# Altium PCB Supply Lines.PcbDoc (part 1 of 3)
Units mil, origin at the board's own origin, x right, y up, seen from the top; angles counter-clockwise.
Board outline 2300 x 4000 mil, 4 copper layers (Top Layer 1, GND, PWR, Bottom Layer 1), stack 23.712 mil thick; 27 components, 16 nets, 73 pads, 20 vias.
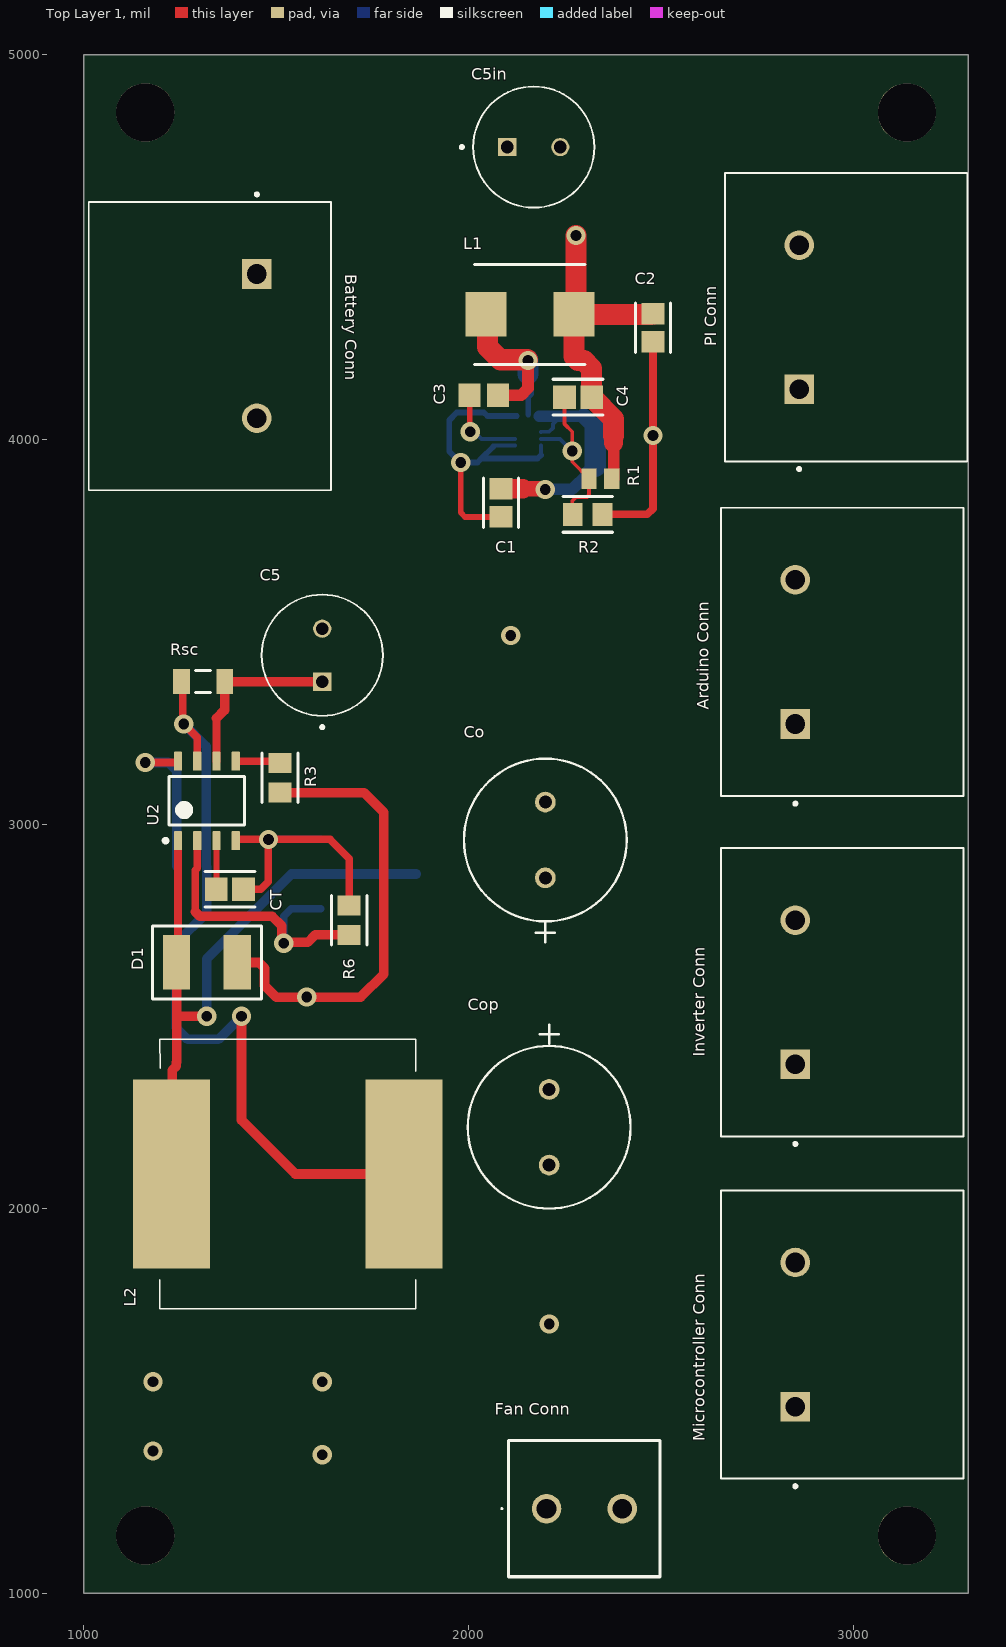
[diagram p0: Top Layer 1 view]
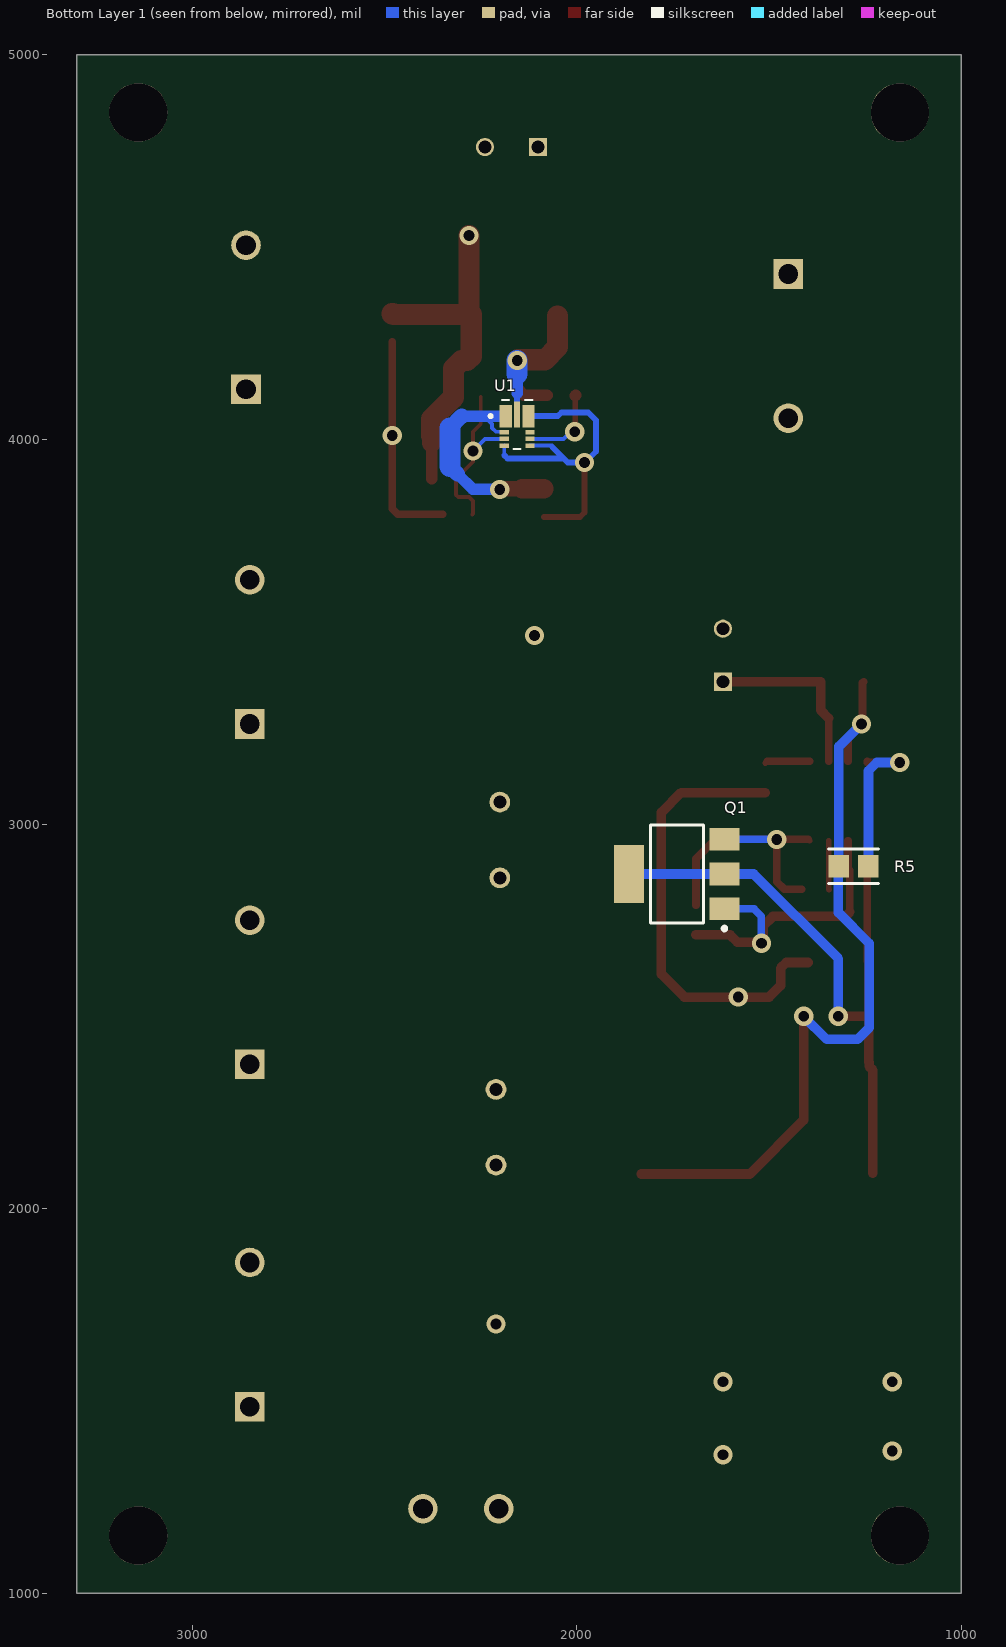
[diagram p1: Bottom Layer 1 view, seen from below]
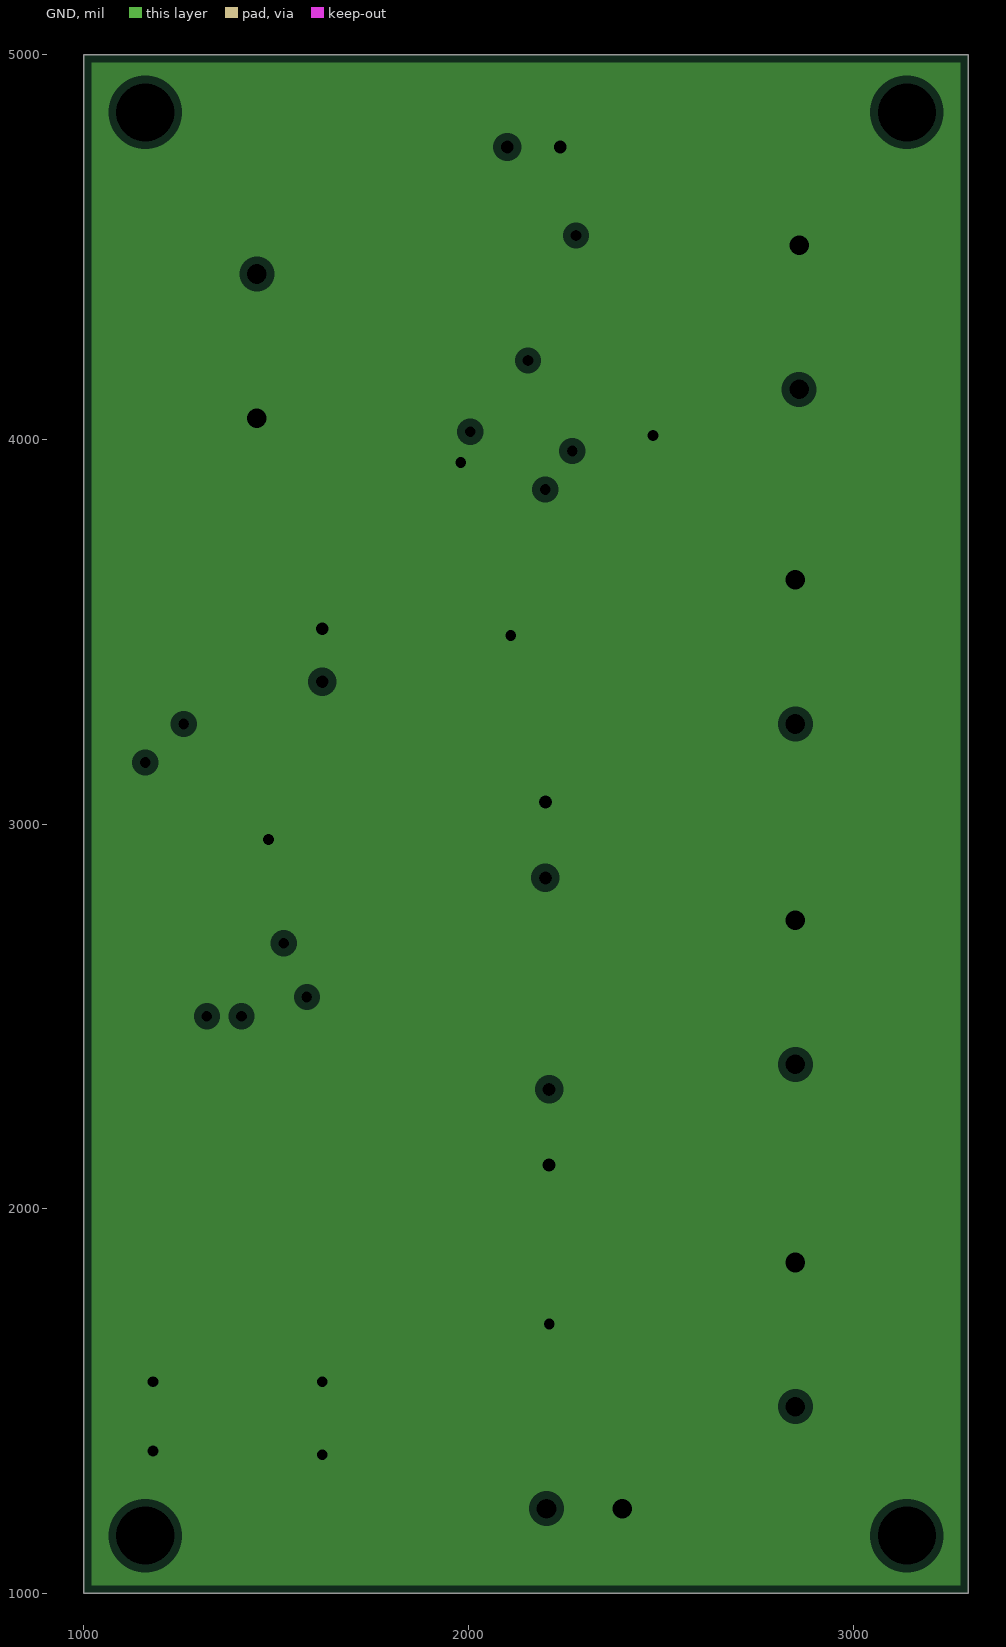
[diagram p2: GND, clearances drawn from the general rule]
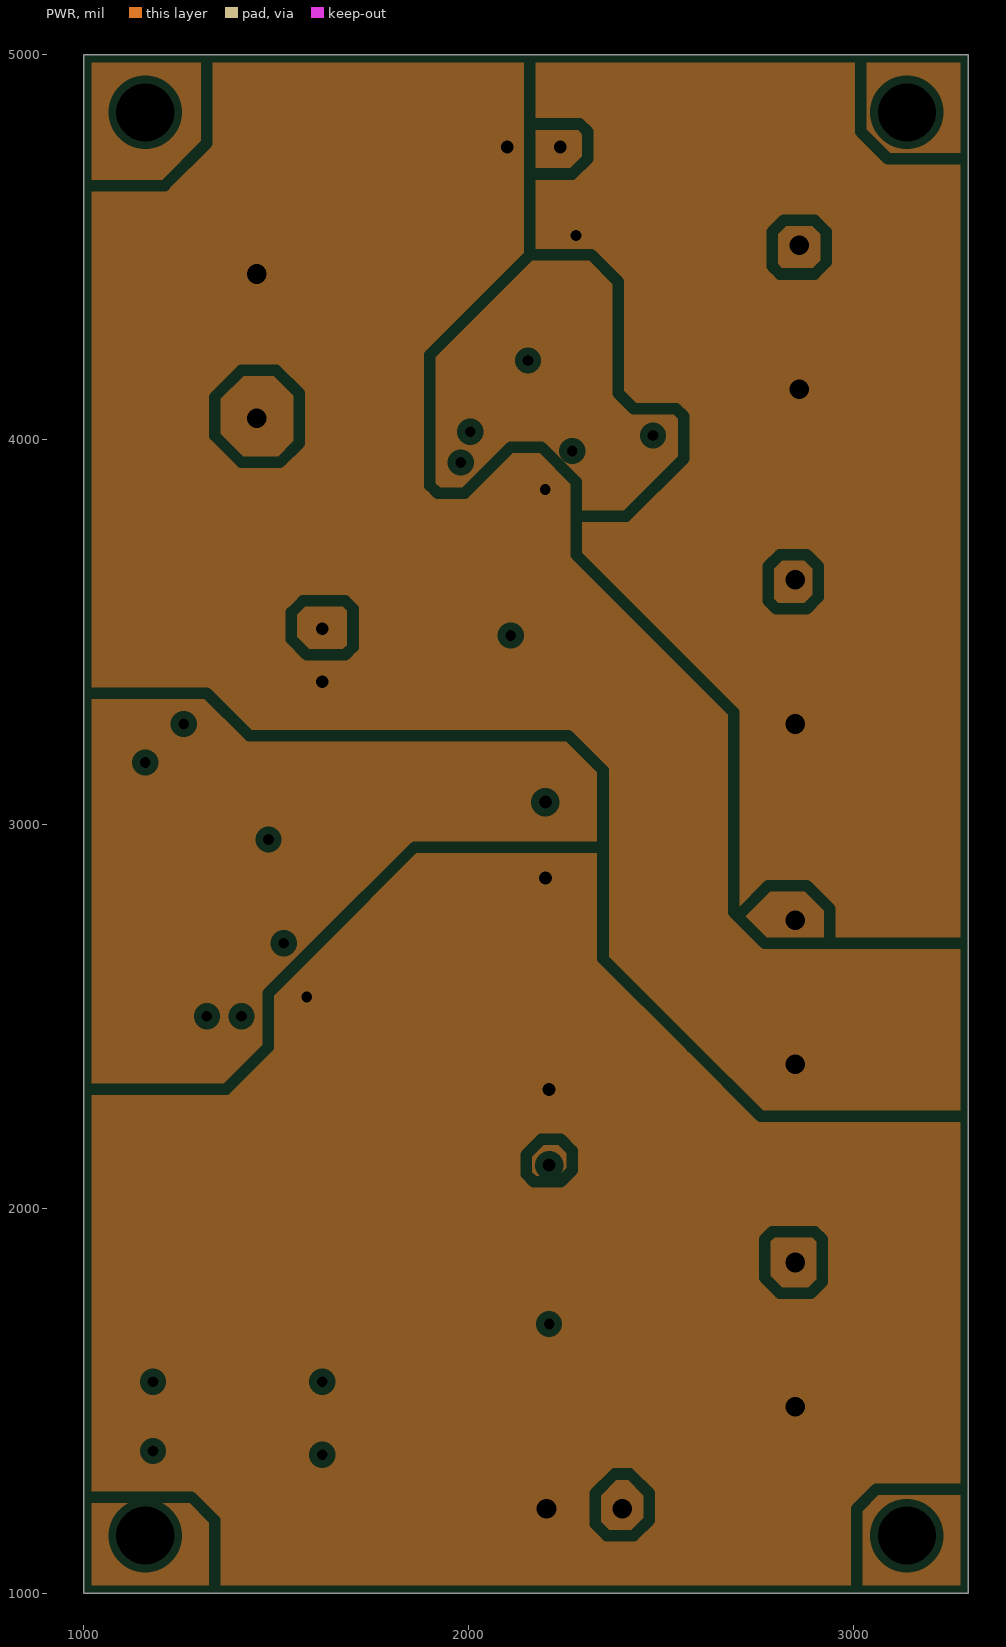
[diagram p3: PWR, clearances drawn from the general rule]
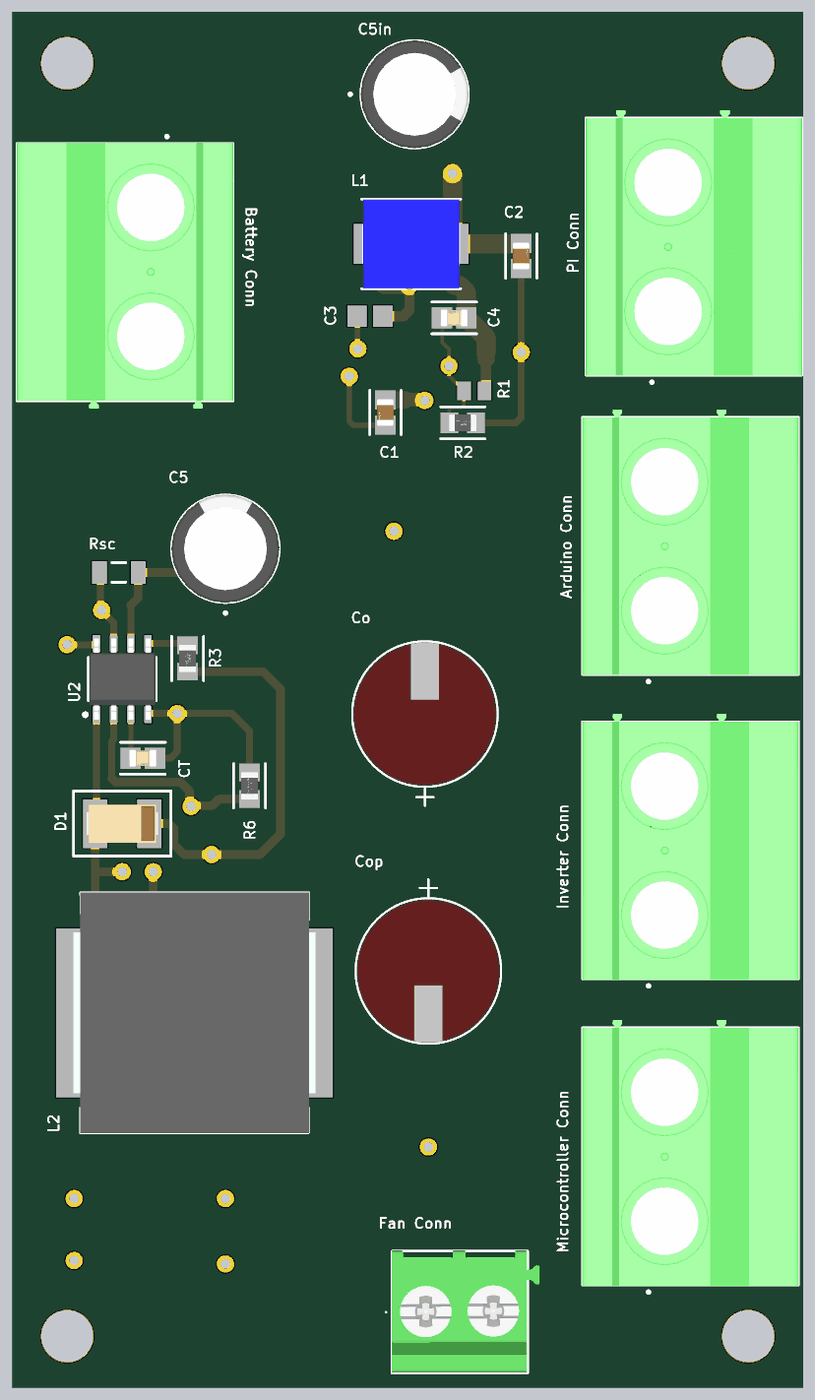
[diagram p4: 3D render of the assembled board from above, using the file's embedded part models]

## Layer stack, top to bottom
Top Solder: solder mask 0.4, Solder Resist, Dk 3.5
Top Layer 1: signal copper 1.378
Dielectric 2: prepreg 2.8, PP-006, Dk 4.1
GND: plane copper 1.378, net GND
Dielectric 1: dielectric 12.6, FR-4, Dk 4.8
PWR: plane copper 1.378
Dielectric 3: prepreg 2.8, PP-006, Dk 4.1
Bottom Layer 1: signal copper 1.378
Bottom Solder: solder mask 0.4, Solder Resist, Dk 3.5

## Board outline
1000,1000 3300,1000 3300,5000 1000,5000

## Design rules (kind name [scope] priority, off if disabled: settings)
Clearance [All] p1: gap=5 ignorepadtopadclearanceinfootprint=FALSE
HoleSize [All] p1: absolutevalues=TRUE maxlimit=250 minlimit=10 maxpercent=80.000 minpercent=20.000
PlaneClearance [All] p1: clearance=20
PlaneConnect [All] p1: planeconnectstyle=Relief reliefexpansion=20 reliefentries=4 reliefconductorwidth=10 reliefairgap=10
PolygonConnect [All] p1: connectstyle=Relief reliefconductorwidth=10 reliefentries=4 polygonreliefangle="90 Angle" airgapwidth=10
RoutingVias [All] p1: holewidth=28 width=50 viastyle="Through Hole" minholewidth=28 minwidth=50 maxholewidth=28 maxwidth=50
SilkToSilkClearance [All] p1: silktosilkclearance=5
SolderMaskExpansion [All] p1: expansion=4 istentingtop=FALSE
SupplyNets "Schematic Supply Nets" [InNet('GND')] p1: voltage=0.000
Width [All] p1: maxlimit=1000 minlimit=5 preferedwidth=10 minimp=50.000000 maximp=50.000000 favimp=50.000000
26 further rules are at their usual default settings.

## Classes and differential pairs
component class U2: C5 Co Cop CT D1 L2 Q1 R3 R4 R5 R6 Rsc U2
component class U1: C1 C2 C3 C4 C5in L1 R1 R2 U1
component class "Supply Lines": "Arduino Conn" "Battery Conn" "Fan Conn" "Inverter Conn" "Microcontroller Conn" "PI Conn"

## Components (designator, comment, footprint, x,y, rotation, side; value= is the part's Value field where it differs from the comment)
"Arduino Conn" "Arduino Conn" PHOENIX_1902547 3287.01,3072.6 r90 top (schematic designator J3)
"Battery Conn" "Battery Connector" PHOENIX_1902547 1012.99,4617.4 r270 top (schematic designator J1)
C1 "10u" FP-GRM21B-0_15-IPC_A 2085,3835 r270 top value=10µF
C2 "47u" FP-GRM21B-0_15-IPC_A 2480,4290 r90 top value=47µF
C3 "100nF" CAPC2013X140X45ML15T25 2040,4115 r180 top
C4 "47p" "(KEMET 0805) FP-C0805C-DN-IPC_A - duplicate" 2285,4110 r0 top value=47pF
C5 "100uF" CAPPRD350W60D800H1150 1620,3438.9 r90 top value=100µF
C5in "100uF" CAPPRD350W60D800H1150 2170,4760 r0 top value=100µF
Co "470u" CAP_PKPZ_10X12P5_LOW_RUB 2200,2860 r90 top value=470µF
Cop "470u" CAP_PKPZ_10X12P5_LOW_RUB 2210,2310 r270 top value=470µF
CT "3.3n" "(KEMET 0805) FP-C0805C-DN-IPC_A - duplicate" 1380,2830 r180 top value=3.3nF
D1 "CDBA3100" CDBA3100 1320,2640 r180 top
"Fan Conn" "Fan Conn" "FileName=C:\Users\cmutt\Documents\ECEN\ECEN 403_404\Supply Lines\Supply Lines.PcbLib" 2203.15,1220 r0 top (schematic designator J6)
"Inverter Conn" "Inverter Conn" PHOENIX_1902547 3287.01,2187.8 r90 top (schematic designator J5)
L1 "6.8u" INDPM7366X300N 2160,4325 r0 top value=6.8µH
L2 "82u" PA4344823ANLT 1530,2090 r270 top value=82µH
"Microcontroller Conn" "Microcontroller Conn" PHOENIX_1902547 3287.01,1297.8 r90 top (schematic designator J4)
"PI Conn" "PI Conn" PHOENIX_1902547 3297.01,3942.6 r90 top (schematic designator J2)
Q1 "NSV60601MZ4T3G" ONSC-SOT-223-4-318E-04_V 1740,2870 r0 bottom
R1 "160k" RESC2013X60X40LL20T25 2343.35,3897.87 r0 top value=160kΩ
R2 "30k" "FP-CRGCQ0805-IPC_A - duplicate" 2310,3805 r180 top value=30kΩ
R3 "1.2k" FP-CRGCQ0805-IPC_A 1510,3120 r270 top value=1.2kΩ
R5 "180" FP-RMCF0805-IPC_A 1280,2890 r180 bottom value=180Ω
R6 "10k" FP-CRGCQ0805-IPC_A 1690,2750 r270 top value=10kΩ
Rsc "0.068" "(1206) RESC3216X70X50NL05T20" 1310,3370 r180 top value=68mΩ
U1 "AP63357DV-7" CONV_AP63357DV-7 2155,4033.9 r180 bottom
U2 "MC33063ADR" D0008A_L 1320,3060 r90 top

## Footprints (in the part's own frame and the unit in brackets; to place one, negate y for a bottom-side part, rotate by r counter-clockwise, add the part's x,y. Pads: shape width x height; smd on the part's side, far side on the other; paste and mask are expansions set on the pad)
"(1206) RESC3216X70X50NL05T20" [mm] "Chip Resistor, 2-Leads, Body 3.20x1.60mm, IPC Medium Density"
  rect 1.1x1.65 smd: 1(-1.425,0) 2(1.425,0)
  silkscreen extent -0.5,-0.72 0.5,0.72, body extent -1.63,-0.82 1.62,0.82, height 0.7
"(KEMET 0805) FP-C0805C-DN-IPC_A - duplicate" [mil]
  rect 59.24x61.27 smd paste+0 mask+0: 1(-35.46,0) 2(35.46,0)
  silkscreen extent -65,-46 65,46, body extent -85,-50 85,50, height 10
CAP_PKPZ_10X12P5_LOW_RUB [mil]
  round 54 / inner round 60 / far side round 54 hole 34 paste-99999 mask+0: 1(0,0) 2(196.85,0)
  silkscreen extent -168,-212 310,212, body extent -108,-206 306,206, height 552
CAPC2013X140X45ML15T25 [mm] "Chip Capacitor, 2-Leads, Body 2.00x1.25mm, IPC Low Density"
  rect 1.45x1.55 smd: 1(-0.95,0) 2(0.95,0)
  body extent -1.08,-0.7 1.07,0.7, height 1.4
CAPPRD350W60D800H1150 [mm]
  round 1.2 hole 0.85: N(1.75,0)
  rect 1.2x1.2 hole 0.85: P(-1.75,0)
  silkscreen extent -4.85,-4 4,4, body extent -4,-4 4,4, height 11.5
CDBA3100 [mm]
  rect 1.8x3.6 smd: A(-2,0) K(2,0)
  silkscreen extent -3.6,-2.4 3.6,2.4, body extent -2.64,-1.4 2.64,1.4, height 2.34
CONV_AP63357DV-7 [mm]
  rect 0.8x1.5 smd mask+0.05: 1(-0.75,0.675) 8(0.75,0.675)
  rect 0.6x0.3 smd mask+0.05: 2(-0.85,-0.375) 3(-0.85,-0.825) 4(-0.85,-1.275) 5(0.85,-1.275) 6(0.85,-0.825) 7(0.85,-0.375)
  rect 0.4x1.73 smd mask+0.05: 9(0,0.79)
  silkscreen extent -1.85,-1.5 1,1.75, body extent -1,-1.5 1,1.5, height 0.85
D0008A_L [mm] "SOIC, 8-Leads, Body 5x4mm, Pitch 1.27mm, IPC High Density"
  rrect18% 1.25x0.55 smd: 1(-2.625,1.905) 2(-2.625,0.635) 3(-2.625,-0.635) 4(-2.625,-1.905) 5(2.625,-1.905) 6(2.625,-0.635) 7(2.625,0.635) 8(2.625,1.905)
  silkscreen extent -2.75,-2.5 1.6,2.85, body extent -3,-2.45 3,2.45, height 1.63
"FileName=C:\Users\cmutt\Documents\ECEN\ECEN 403_404\Supply Lines\Supply Lines.PcbLib" [mm]
  round 1.95 hole 1.3: 1(0,0) 2(5,0)
  silkscreen extent -3,-4.5 7.5,4.5, body extent -2.53,-4.44 8.38,4.55, height 13.5
FP-CRGCQ0805-IPC_A [mil]
  rect 51.42x59.44 smd paste+0 mask+0: 1(-38.43,0) 2(38.43,0)
  silkscreen extent -64,-46 64,46, body extent -84,-49 84,49, height 10
"FP-CRGCQ0805-IPC_A - duplicate" [mil]
  rect 51.42x59.44 smd paste+0 mask+0: 1(-38.43,0) 2(38.43,0)
  silkscreen extent -64,-46 64,46, body extent -84,-49 84,49, height 10
FP-GRM21B-0_15-IPC_A [mil]
  rect 55.34x59.38 smd paste+0 mask+0: 1(-36.47,0) 2(36.47,0)
  silkscreen extent -64,-45 64,45, body extent -39,-25 39,25, height 55
FP-RMCF0805-IPC_A [mil]
  rect 53.33x57.56 smd paste+0 mask+0: 1(-38.42,0) 2(38.42,0)
  silkscreen extent -65,-45 65,45, body extent -39,-25 39,25, height 26
INDPM7366X300N [mm]
  rect 2.7x2.95 smd: 1(-2.9,0) 2(2.9,0)
  silkscreen extent -3.65,-3.3 3.65,3.3, body extent -3.65,-3.3 3.65,3.3, height 3
ONSC-SOT-223-4-318E-04_V [mm] "SOT223, 4-Leads, Body 6.5x3.5mm, Pitch 2.3mm"
  rect 2x1.5 smd: 1(-3.15,2.3) 2(-3.15,0) 3(-3.15,-2.3)
  rect 2x3.8 smd: 4(3.15,0)
  silkscreen extent -3.27,-3.25 1.75,3.72, body extent -1.75,-3.25 1.75,3.25, height 1.75
PA4344823ANLT [mm]
  rect 12.5x5.08 smd: 1(0,7.675) 2(0,-7.675)
  silkscreen extent -8.9,-8.45 8.9,8.45, body extent -8.9,-8.94 8.9,8.94, height 8.1
PHOENIX_1902547 [mm]
  rect 1.95x1.95 / inner round 1.95 / far side rect 1.95x1.95 hole 1.3: 1(4.76,11.1)
  round 1.95 hole 1.3: 2(14.28,11.1)
  silkscreen extent -0.6,0 19.04,16, body extent -0.03,0 19.58,16, height 21.5
RESC2013X60X40LL20T25 [mm] "Chip Resistor, 2-Leads, Body 2.00x1.25mm, IPC High Density"
  rect 1x1.35 smd: 1(-0.75,0) 2(0.75,0)
  body extent -1.1,-0.72 1.1,0.72, height 0.6

## Part data
"Arduino Conn" "Battery Conn" "Inverter Conn" "Microcontroller Conn" "PI Conn": library part 1902547, "Conn PC Terminal Block 2 POS 9.52mm Solder ST Thru-Hole 32A Cardboard", Color=Green, Current=30A, Current Rating=32A, Flammability Rating="UL94 V-0", Manufacturer="Phoenix Contact", Supplier Part Number=277-5951-ND, Voltage=600V, Voltage Rating=800V, Approvals="CSA, UL", Category="Terminal Blocks", China RoHS=Compliant, ComponentLink1Description=https://datasheet.octopart.com:443/1902547-Phoenix-Contact-datasheet-86450925.pdf?src-supplier=Farnell, ComponentLink1URL=https://datasheet.octopart.com:443/1902547-Phoenix-Contact-datasheet-86450925.pdf?src-supplier=Farnell, ComponentLink2Description=https://datasheet.octopart.com:443/MKDS-5-HV--2-9%2C52-Phoenix-Contact-datasheet-58098511.pdf?src-supplier=element14+APAC, ComponentLink2URL=https://datasheet.octopart.com:443/MKDS-5-HV--2-9%2C52-Phoenix-Contact-datasheet-58098511.pdf?src-supplier=element14+APAC, ComponentLink3Description=https://datasheet.octopart.com:443/1902547-Phoenix-Contact-datasheet-154783129.pdf?src-supplier=Electro+Sonic, ComponentLink3URL=https://datasheet.octopart.com:443/1902547-Phoenix-Contact-datasheet-154783129.pdf?src-supplier=Electro+Sonic, ComponentLink4Description=https://datasheet.octopart.com:443/1902547-Phoenix-Contact-datasheet-177362804.pdf?src-supplier=Burklin+Elektronik, ComponentLink4URL=https://datasheet.octopart.com:443/1902547-Phoenix-Contact-datasheet-177362804.pdf?src-supplier=Burklin+Elektronik, ComponentLink5Description=https://datasheet.octopart.com:443/1902547-Phoenix-Contact-datasheet-13545994.pdf?src-supplier=RS+(Formerly+Allied+Electronics), ComponentLink5URL=https://datasheet.octopart.com:443/1902547-Phoenix-Contact-datasheet-13545994.pdf?src-supplier=RS+(Formerly+Allied+Electronics), ComponentLink6Description=https://datasheet.octopart.com:443/1902547-Phoenix-Contact-datasheet-62122993.pdf?src-supplier=RS+(Formerly+Allied+Electronics), ComponentLink6URL=https://datasheet.octopart.com:443/1902547-Phoenix-Contact-datasheet-62122993.pdf?src-supplier=RS+(Formerly+Allied+Electronics), ComponentLink7Description=https://datasheet.octopart.com:443/1902547-Phoenix-Contact-datasheet-33514357.pdf?src-supplier=MRO+Stop, ComponentLink7URL=https://datasheet.octopart.com:443/1902547-Phoenix-Contact-datasheet-33514357.pdf?src-supplier=MRO+Stop, ComponentLink8Description=https://datasheet.octopart.com:443/1902547-Phoenix-Contact-datasheet-11802246.pdf?src-supplier=Arrow+Electronics, ComponentLink8URL=https://datasheet.octopart.com:443/1902547-Phoenix-Contact-datasheet-11802246.pdf?src-supplier=Arrow+Electronics, Contact Material=Tin, Depth=21.5mm, Gender=Male, Height=21.5mm, Housing Color=Green, Housing Material=Polyamide, Lead Free="Lead Free", Length=19.04mm, Lifecycle Status=Production, Manufacturer Part Number=1902547, Material=Polyamide, Max Current Rating=32A, Mounting Technology=Screw, Number of Circuits=2, Number of Contacts=2, Number of Levels=1, Number of Poles=2, Number of Positions=2, Number of Positions Per Level=2, Number of Rows=1, Orientation=Straight, Pins=2, Pitch=9.52mm, Pricing="1=2.05, 10=1.543, 25=1.2168 (USD)", REACH SVHC=Yes, RoHS=Compliant, Stock=2575, Supplier=DigiKey, Termination=Screw, Weight=6.719999g, Width=16mm, Wire Gauge (Max)=30AWG, Wire Gauge (Min)=10AWG, Wire/Cable Gauge=10AWG
C1: library part GRM21BC81E106KE51L, "Ceramic Capacitor, Ceramic, 25V, 10% +Tol, 10% -Tol, X6S, 22% TC, 10uF, Surface Mount, 0805", Case Code (Imperial)=0805, Case Code (Metric)=2012, Dielectric=X6S, Dielectric Material=Ceramic, Manufacturer=Murata, Manufacturer Lifecycle Status="IN PRODUCTION", Max Operating Temperature=105°C, Min Operating Temperature=-55°C, Supplier Part Number=490-10502-1-ND, Tolerance=10%, Voltage Rating=25V, Case/Package=0805, Category="Ceramic Capacitors", ComponentLink1Description=https://datasheet.octopart.com:443/GRM21BC81E106KE51L-Murata-datasheet-155239200.pdf?src-supplier=Newark, ComponentLink1URL=https://datasheet.octopart.com:443/GRM21BC81E106KE51L-Murata-datasheet-155239200.pdf?src-supplier=Newark, ComponentLink2Description=https://datasheet.octopart.com:443/GRM21BC81E106KE51L-Murata-datasheet-178521784.pdf?src-supplier=Arrow.cn, ComponentLink2URL=https://datasheet.octopart.com:443/GRM21BC81E106KE51L-Murata-datasheet-178521784.pdf?src-supplier=Arrow.cn, ComponentLink3Description=https://datasheet.octopart.com:443/GRM21BC81E106KE51L-Murata-datasheet-165579666.pdf?src-supplier=TME, ComponentLink3URL=https://datasheet.octopart.com:443/GRM21BC81E106KE51L-Murata-datasheet-165579666.pdf?src-supplier=TME, ComponentLink4Description=https://datasheet.octopart.com:443/GRM21BC81E106KE51L-Murata-datasheet-140707432.pdf?src-supplier=Ciiva, ComponentLink4URL=https://datasheet.octopart.com:443/GRM21BC81E106KE51L-Murata-datasheet-140707432.pdf?src-supplier=Ciiva, ComponentLink5Description=https://datasheet.octopart.com:443/GRM21BC81E106KE51L-Murata-datasheet-140706587.pdf?src-supplier=Ciiva, ComponentLink5URL=https://datasheet.octopart.com:443/GRM21BC81E106KE51L-Murata-datasheet-140706587.pdf?src-supplier=Ciiva, ComponentLink6Description=https://datasheet.octopart.com:443/GRM21BC81E106KE51L-Murata-datasheet-138744753.pdf?src-supplier=Ciiva, ComponentLink6URL=https://datasheet.octopart.com:443/GRM21BC81E106KE51L-Murata-datasheet-138744753.pdf?src-supplier=Ciiva, ComponentLink7Description=https://datasheet.octopart.com:443/GRM21BC81E106KE51L-Murata-datasheet-32479577.pdf?src-supplier=Future+Electronics, ComponentLink7URL=https://datasheet.octopart.com:443/GRM21BC81E106KE51L-Murata-datasheet-32479577.pdf?src-supplier=Future+Electronics, ComponentLink8Description=https://datasheet.octopart.com/GRM21BC81E106KE51L-Murata-datasheet-12515295.pdf, ComponentLink8URL=https://datasheet.octopart.com/GRM21BC81E106KE51L-Murata-datasheet-12515295.pdf, ComponentLink9Description=https://datasheet.octopart.com/GRM21BC81E106KE51L-Murata-datasheet-12510076.pdf, ComponentLink9URL=https://datasheet.octopart.com/GRM21BC81E106KE51L-Murata-datasheet-12510076.pdf, ComponentLink10Description=https://datasheet.octopart.com/GRM21BC81E106KE51L-Murata-datasheet-11978611.pdf, ComponentLink10URL=https://datasheet.octopart.com/GRM21BC81E106KE51L-Murata-datasheet-11978611.pdf, ComponentLink11Description=https://datasheet.octopart.com/GRM21BC81E106KE51L-Murata-datasheet-10025737.pdf, ComponentLink11URL=https://datasheet.octopart.com/GRM21BC81E106KE51L-Murata-datasheet-10025737.pdf, ComponentLink12Description=https://datasheet.octopart.com/GRM21BC81E106KE51L-Murata-datasheet-8819587.pdf, ComponentLink12URL=https://datasheet.octopart.com/GRM21BC81E106KE51L-Murata-datasheet-8819587.pdf, ComponentLink13Description=https://datasheet.octopart.com/GRM21BC81E106KE51L-Murata-datasheet-38883375.pdf, ComponentLink13URL=https://datasheet.octopart.com/GRM21BC81E106KE51L-Murata-datasheet-38883375.pdf, ComponentLink14Description=http://sigma.octopart.com:80/reach_statement/Murata-company-16.pdf?src-supplier=Compliance+Statements, ComponentLink14URL=http://sigma.octopart.com:80/reach_statement/Murata-company-16.pdf?src-supplier=Compliance+Statements, Height=1.25mm, Length=2mm, Lifecycle Status=Production, Manufacturer Part Number=GRM21BC81E106KE51L, Material=Ceramic, Mounting Technology="Surface Mount", Number of Terminals=2, Pricing="1=0.23, 10=0.133, 50=0.0956, 100=0.0841, 500=0.06476, 1000=0.05881 (USD)", REACH SVHC=Yes, RoHS=Compliant, Schedule B="8532240020, 8532240020|8532240020|8532240020|8532240020|8532240020|8532240020|8532240020|8532240020|8532240020|8532240020|8532240020|8532240020|8532240020|8532240020|8532240020|8532240020|8532240020|8532240020|8532240020|8532240020|8532240020|8532240020|8532240020|85", Stock=699194, Supplier=DigiKey, Thickness=1.25mm, Voltage Rating (DC)=25V, Width=1.25mm
C2: library part GRM21BR61A476ME15L, "10V 47uF X5R ±20% 0805 Multilayer Ceramic Capacitors MLCC - SMD/SMT ROHS", Case Code (Imperial)=0805, Case Code (Metric)=2012, Dielectric=X5R, Dielectric Material=Ceramic, Manufacturer=Murata, Manufacturer Lifecycle Status="IN PRODUCTION", Max Operating Temperature=85°C, Min Operating Temperature=-55°C, Supplier Part Number=81-GRM21BR61A476ME5L, Tolerance=20%, Voltage=10V, Case/Package=0805, Category="Ceramic Capacitors", ComponentLink1Description=https://datasheet.octopart.com:443/GRM21BR61A476ME15L-Murata-datasheet-22122223.pdf?src-supplier=Upverter, ComponentLink1URL=https://datasheet.octopart.com:443/GRM21BR61A476ME15L-Murata-datasheet-22122223.pdf?src-supplier=Upverter, ComponentLink2Description=https://datasheet.octopart.com:443/GRM21BR61A476ME15L-Murata-datasheet-66077109.pdf?src-supplier=element14+APAC, ComponentLink2URL=https://datasheet.octopart.com:443/GRM21BR61A476ME15L-Murata-datasheet-66077109.pdf?src-supplier=element14+APAC, ComponentLink3Description=https://datasheet.octopart.com:443/GRM21BR61A476ME15L-Murata-datasheet-141278181.pdf?src-supplier=Geoflip, ComponentLink3URL=https://datasheet.octopart.com:443/GRM21BR61A476ME15L-Murata-datasheet-141278181.pdf?src-supplier=Geoflip, ComponentLink4Description=https://datasheet.octopart.com:443/GRM21BR61A476ME15L-Murata-datasheet-165579666.pdf?src-supplier=TME, ComponentLink4URL=https://datasheet.octopart.com:443/GRM21BR61A476ME15L-Murata-datasheet-165579666.pdf?src-supplier=TME, ComponentLink5Description=https://datasheet.octopart.com:443/GRM21BR61A476ME15L-Murata-datasheet-59876780.pdf?src-supplier=TME, ComponentLink5URL=https://datasheet.octopart.com:443/GRM21BR61A476ME15L-Murata-datasheet-59876780.pdf?src-supplier=TME, ComponentLink6Description=https://datasheet.octopart.com:443/GRM21BR61A476ME15L-Murata-datasheet-140707527.pdf?src-supplier=Ciiva, ComponentLink6URL=https://datasheet.octopart.com:443/GRM21BR61A476ME15L-Murata-datasheet-140707527.pdf?src-supplier=Ciiva, ComponentLink7Description=https://datasheet.octopart.com:443/GRM21BR61A476ME15L-Murata-datasheet-138744839.pdf?src-supplier=Ciiva, ComponentLink7URL=https://datasheet.octopart.com:443/GRM21BR61A476ME15L-Murata-datasheet-138744839.pdf?src-supplier=Ciiva, ComponentLink8Description=https://datasheet.octopart.com/GRM21BR61A476ME15L-Murata-datasheet-12515295.pdf, ComponentLink8URL=https://datasheet.octopart.com/GRM21BR61A476ME15L-Murata-datasheet-12515295.pdf, ComponentLink9Description=https://datasheet.octopart.com/GRM21BR61A476ME15L-Murata-datasheet-12510076.pdf, ComponentLink9URL=https://datasheet.octopart.com/GRM21BR61A476ME15L-Murata-datasheet-12510076.pdf, ComponentLink10Description=https://datasheet.octopart.com/GRM21BR61A476ME15L-Murata-datasheet-11978611.pdf, ComponentLink10URL=https://datasheet.octopart.com/GRM21BR61A476ME15L-Murata-datasheet-11978611.pdf, ComponentLink11Description=https://datasheet.octopart.com/GRM21BR61A476ME15L-Murata-datasheet-10025737.pdf, ComponentLink11URL=https://datasheet.octopart.com/GRM21BR61A476ME15L-Murata-datasheet-10025737.pdf, ComponentLink12Description=https://datasheet.octopart.com/GRM21BR61A476ME15L-Murata-datasheet-8819587.pdf, ComponentLink12URL=https://datasheet.octopart.com/GRM21BR61A476ME15L-Murata-datasheet-8819587.pdf, ComponentLink13Description=http://sigma.octopart.com:80/reach_statement/Murata-company-16.pdf?src-supplier=Compliance+Statements, ComponentLink13URL=http://sigma.octopart.com:80/reach_statement/Murata-company-16.pdf?src-supplier=Compliance+Statements, Country of Origin=Philippines, Depth=1.25mm, Dissipation Factor=0.035%, Export Control Classification Number (ECCN) Code=EAR99, Harmonized Tariff Schedule (HTS) Code=8532.24.00.20, Height=1.25mm, Introduction Date=2013-11-20, Lead Free="Lead Free", Length=2mm, Lifecycle Status=Production, Manufacturer Part Number=GRM21BR61A476ME15L, Material=Ceramic, Mounting Technology="Surface Mount", Number of Terminals=2, Packaging="Cut Tape", Pricing="1=0.64, 10=0.423, 50=0.285, 100=0.264, 500=0.213, 1000=0.195, 3000=0.152, 6000=0.147, 10000=0.17 (USD)", REACH SVHC=Yes, RoHS=Compliant, Schedule B="8532240020, 8532240020|8532240020, 8532240020|8532240020|8532240020, 8532240020|8532240020|8532240020|8532240020", Stock=454455, Supplier=Mouser, Termination=SMD/SMT, Thickness=1.25mm, Voltage Rating=10V, Voltage Rating (DC)=10V, Width=1.25mm
C3: library part GCM21BR71E104KA37L, "Ceramic Capacitor, Ceramic, 25V, 10% +Tol, 10% -Tol, X7R, 15% TC, 0.1uF, Surface Mount, 0805", Case Code (Imperial)=0805, Case Code (Metric)=2012, Dielectric=X7R, Dielectric Material=Ceramic, Manufacturer=Murata, Manufacturer Lifecycle Status=NRND, Max Operating Temperature=125°C, Min Operating Temperature=-55°C, Ratings=AEC-Q200, Supplier Part Number=490-14779-1-ND, Tolerance=10%, Voltage Rating=25V, Case/Package=0805, Category="Ceramic Capacitors", ComponentLink1Description=https://datasheet.octopart.com:443/GCM21BR71E104KA37L-Murata-datasheet-141268656.pdf?src-supplier=Geoflip, ComponentLink1URL=https://datasheet.octopart.com:443/GCM21BR71E104KA37L-Murata-datasheet-141268656.pdf?src-supplier=Geoflip, ComponentLink2Description=https://datasheet.octopart.com:443/GCM21BR71E104KA37L-Murata-datasheet-140660253.pdf?src-supplier=Ciiva, ComponentLink2URL=https://datasheet.octopart.com:443/GCM21BR71E104KA37L-Murata-datasheet-140660253.pdf?src-supplier=Ciiva, ComponentLink3Description=https://datasheet.octopart.com:443/GCM21BR71E104KA37L-Murata-datasheet-138719617.pdf?src-supplier=Ciiva, ComponentLink3URL=https://datasheet.octopart.com:443/GCM21BR71E104KA37L-Murata-datasheet-138719617.pdf?src-supplier=Ciiva, ComponentLink4Description=https://datasheet.octopart.com:443/GCM21BR71E104KA37L-Murata-datasheet-128592896.pdf?src-supplier=X-ON, ComponentLink4URL=https://datasheet.octopart.com:443/GCM21BR71E104KA37L-Murata-datasheet-128592896.pdf?src-supplier=X-ON, ComponentLink5Description=https://datasheet.octopart.com/GCM21BR71E104KA37L-Murata-datasheet-14404970.pdf, ComponentLink5URL=https://datasheet.octopart.com/GCM21BR71E104KA37L-Murata-datasheet-14404970.pdf, ComponentLink6Description=http://sigma.octopart.com:80/reach_statement/Murata-company-16.pdf?src-supplier=Compliance+Statements, ComponentLink6URL=http://sigma.octopart.com:80/reach_statement/Murata-company-16.pdf?src-supplier=Compliance+Statements, Depth=1.25mm, Height=1.25mm, Length=2mm, Lifecycle Status=NRND, Manufacturer Part Number=GCM21BR71E104KA37L, Mounting Technology="Surface Mount", Number of Terminals=2, Pricing="1=0.35, 10=0.208, 50=0.1528, 100=0.1358, 500=0.10726, 1000=0.09846 (USD)", Radiation Hardening=No, REACH SVHC=Yes, RoHS=Compliant, Schedule B="8532240020, 8532240020|8532240020|8532240020|8532240020|8532240020", Stock=12316, Supplier=DigiKey, Termination=SMD/SMT, Voltage Rating (DC)=25V, Width=1.25mm
C4: library part C0805C470J5GACTU, "50V 47pF C0G ±5% 0805 Multilayer Ceramic Capacitors MLCC - SMD/SMT ROHS", Case Code (Imperial)=0805, Dielectric Material=Ceramic, Manufacturer=KEMET, Max Operating Temperature=125°C, Min Operating Temperature=-55°C, Supplier Part Number=399-C0805C470J5GACTUCT-ND, Temperature Coefficient=30ppm/°C, Tolerance=5%, Voltage=50V, Case/Package=0805, Category="Ceramic Capacitors", China RoHS=Compliant, ComponentLink1Description=https://datasheet.octopart.com:443/C0805C470J5GACTU-KEMET-datasheet-178132257.pdf?src-supplier=IHS, ComponentLink1URL=https://datasheet.octopart.com:443/C0805C470J5GACTU-KEMET-datasheet-178132257.pdf?src-supplier=IHS, ComponentLink2Description=https://datasheet.octopart.com:443/C0805C470J5GAC7800-KEMET-datasheet-182042351.pdf?src-supplier=IHS, ComponentLink2URL=https://datasheet.octopart.com:443/C0805C470J5GAC7800-KEMET-datasheet-182042351.pdf?src-supplier=IHS, ComponentLink3Description=https://datasheet.octopart.com:443/C0805C470J5GACTU-KEMET-datasheet-68331921.pdf?src-supplier=Upverter, ComponentLink3URL=https://datasheet.octopart.com:443/C0805C470J5GACTU-KEMET-datasheet-68331921.pdf?src-supplier=Upverter, ComponentLink4Description=https://datasheet.octopart.com:443/C0805C470J5GACTU-Kemet-datasheet-5314449.pdf?src-supplier=Newark, ComponentLink4URL=https://datasheet.octopart.com:443/C0805C470J5GACTU-Kemet-datasheet-5314449.pdf?src-supplier=Newark, ComponentLink5Description=https://datasheet.octopart.com:443/C0805C470J5GACTU-Kemet-datasheet-10282724.pdf?src-supplier=Newark, ComponentLink5URL=https://datasheet.octopart.com:443/C0805C470J5GACTU-Kemet-datasheet-10282724.pdf?src-supplier=Newark, ComponentLink6Description=https://datasheet.octopart.com:443/C0805C470J5GACTU-KEMET-datasheet-170667471.pdf?src-supplier=Newark, ComponentLink6URL=https://datasheet.octopart.com:443/C0805C470J5GACTU-KEMET-datasheet-170667471.pdf?src-supplier=Newark, ComponentLink7Description=https://datasheet.octopart.com:443/C0805C470J5GACTU-KEMET-datasheet-149524325.pdf?src-supplier=Farnell, ComponentLink7URL=https://datasheet.octopart.com:443/C0805C470J5GACTU-KEMET-datasheet-149524325.pdf?src-supplier=Farnell, ComponentLink8Description=https://datasheet.octopart.com:443/C0805C470J5GACTU-KEMET-datasheet-101576292.pdf?src-supplier=Farnell, ComponentLink8URL=https://datasheet.octopart.com:443/C0805C470J5GACTU-KEMET-datasheet-101576292.pdf?src-supplier=Farnell, ComponentLink9Description=https://datasheet.octopart.com:443/C0805C470J5GACTU-Kemet-datasheet-10540709.pdf?src-supplier=Farnell, ComponentLink9URL=https://datasheet.octopart.com:443/C0805C470J5GACTU-Kemet-datasheet-10540709.pdf?src-supplier=Farnell, ComponentLink10Description=https://datasheet.octopart.com:443/C0805C470J5GACTU-KEMET-datasheet-178088151.pdf?src-supplier=element14+APAC, ComponentLink10URL=https://datasheet.octopart.com:443/C0805C470J5GACTU-KEMET-datasheet-178088151.pdf?src-supplier=element14+APAC, ComponentLink11Description=https://datasheet.octopart.com:443/C0805C470J5GACTU-KEMET-datasheet-178088150.pdf?src-supplier=element14+APAC, ComponentLink11URL=https://datasheet.octopart.com:443/C0805C470J5GACTU-KEMET-datasheet-178088150.pdf?src-supplier=element14+APAC, ComponentLink12Description=https://datasheet.octopart.com:443/C0805C470J5GACTU-Kemet-datasheet-22084244.pdf?src-supplier=element14+APAC, ComponentLink12URL=https://datasheet.octopart.com:443/C0805C470J5GACTU-Kemet-datasheet-22084244.pdf?src-supplier=element14+APAC, ComponentLink13Description=https://datasheet.octopart.com:443/C0805C470J5GACTU-Kemet-datasheet-48876295.pdf?src-supplier=element14+APAC, ComponentLink13URL=https://datasheet.octopart.com:443/C0805C470J5GACTU-Kemet-datasheet-48876295.pdf?src-supplier=element14+APAC, ComponentLink14Description=https://datasheet.octopart.com:443/C0805C470J5GACTU-KEMET-datasheet-37178240.pdf?src-supplier=Electro+Sonic, ComponentLink14URL=https://datasheet.octopart.com:443/C0805C470J5GACTU-KEMET-datasheet-37178240.pdf?src-supplier=Electro+Sonic, ComponentLink15Description=https://datasheet.octopart.com:443/C0805C470J5GACTU-Kemet-datasheet-68096432.pdf?src-supplier=TME, ComponentLink15URL=https://datasheet.octopart.com:443/C0805C470J5GACTU-Kemet-datasheet-68096432.pdf?src-supplier=TME, ComponentLink16Description=https://datasheet.octopart.com/C0805C470J5GACTU-KEMET-datasheet-84169754.pdf, ComponentLink16URL=https://datasheet.octopart.com/C0805C470J5GACTU-KEMET-datasheet-84169754.pdf, ComponentLink17Description=https://datasheet.octopart.com:443/C0805C470J5GACTU-Kemet-datasheet-11967729.pdf?src-supplier=Arrow+Electronics, ComponentLink17URL=https://datasheet.octopart.com:443/C0805C470J5GACTU-Kemet-datasheet-11967729.pdf?src-supplier=Arrow+Electronics, ComponentLink18Description=https://datasheet.octopart.com:443/C0805C470J5GAC7800-KEMET-datasheet-164857143.pdf?src-supplier=Burklin+Elektronik, ComponentLink18URL=https://datasheet.octopart.com:443/C0805C470J5GAC7800-KEMET-datasheet-164857143.pdf?src-supplier=Burklin+Elektronik, ComponentLink19Description=https://datasheet.octopart.com:443/C0805C470J5GAC-TU-Kemet-datasheet-7589841.pdf?src-supplier=Jameco, ComponentLink19URL=https://datasheet.octopart.com:443/C0805C470J5GAC-TU-Kemet-datasheet-7589841.pdf?src-supplier=Jameco, ComponentLink20Description=https://datasheet.octopart.com:443/C0805C470J5GACTU-Kemet-datasheet-464.pdf?src-supplier=RS+(Formerly+Allied+Electronics), ComponentLink20URL=https://datasheet.octopart.com:443/C0805C470J5GACTU-Kemet-datasheet-464.pdf?src-supplier=RS+(Formerly+Allied+Electronics), Contact Material=Tin, Depth=1.25mm, Dissipation Factor=0.1%, Height=780µm, Lead Free="Lead Free", Lead Pitch=750µm, Length=2mm, Lifecycle Status=Production, Manufacturer Part Number=C0805C470J5GACTU, Material=Ceramic, Mounting Technology="Surface Mount", Number of Terminals=2, Packaging="Cut Tape", Pins=2, Pricing="1=0.1, 10=0.049, 50=0.0334, 100=0.0287, 500=0.02092, 1000=0.01854 (USD)", Radiation Hardening=No, REACH SVHC=Yes, RoHS=Compliant, Schedule B="8532240020, 8532240020|8532240020|8532240020|8532240020|8532240020, 8532240020|8532240020|8532240020|8532240020|8532240020|8532240020|8532240020|8532240020|8532240020, 8532240020|8532240020|8532240020|8532240020|8532240020|8532240020|8532240020|8532240020|8532240020|8532240020", Stock=124597, Supplier=DigiKey, Termination=SMD/SMT, Thickness=889µm, Voltage Rating=50V, Voltage Rating (DC)=50V, Width=1.25mm
C5 C5in: library part EEU-FR1V101B, "FR ALUMINUM ELECTROLYTIC CAPACITOR Radial Can aluminum electrolytic capacitor 0.315Dia 8.00mm ±20% 100muF 35V", Case/Package=Radial, Manufacturer=Panasonic, Max Operating Temperature=105°C, Min Operating Temperature=-40°C, Ripple Current=950mA, Supplier Part Number=P124226CT-ND, Tolerance=20%, Category="Aluminum Electrolytic Capacitors", ComponentLink1Description=https://datasheet.octopart.com:443/EEU-FR1V101B-Panasonic-datasheet-62330550.pdf?src-supplier=Electro+Sonic, ComponentLink1URL=https://datasheet.octopart.com:443/EEU-FR1V101B-Panasonic-datasheet-62330550.pdf?src-supplier=Electro+Sonic, Contact Plating=Tin, Diameter=8mm, Lead Diameter=600µm, Lead Pitch=5mm, Life (Hours)=6000hours, Manufacturer Part Number=EEU-FR1V101B, Mounting Technology="Through Hole", Pricing="1=0.61, 10=0.383, 50=0.2852, 100=0.2542, 500=0.20076 (USD)", RoHS=Compliant, Schedule B="8532220020, 8532220020|8532220020, 8532220020|8532220020|8532220020, 8532220020|8532220020|8532220020|8532220020", Stock=15444, Supplier=DigiKey, Termination=Radial
Co Cop: library part 35PX470MEFC10X12.5, "Aluminum Electrolytic Capacitor, Polarized, Aluminum (wet), 35V, 20% +Tol, 20% -Tol, 470uF", Case/Package=Radial, Manufacturer=Rubycon, Max Operating Temperature=105°C, Min Operating Temperature=-55°C, Ripple Current=525mA, Supplier Part Number=232-35PX470MEFC10X12, Tolerance=20%, Voltage Rating=35V, Category="Aluminum Electrolytic Capacitors", ComponentLink1Description=https://datasheet.octopart.com:443/35PX470MEFC10X12.5-Rubycon-datasheet-159569471.pdf?src-supplier=IHS, ComponentLink1URL=https://datasheet.octopart.com:443/35PX470MEFC10X12.5-Rubycon-datasheet-159569471.pdf?src-supplier=IHS, ComponentLink2Description=https://datasheet.octopart.com:443/35PX470MEFC10X12.5-Rubycon-datasheet-86451557.pdf?src-supplier=Master+Electronics, ComponentLink2URL=https://datasheet.octopart.com:443/35PX470MEFC10X12.5-Rubycon-datasheet-86451557.pdf?src-supplier=Master+Electronics, ComponentLink3Description=https://datasheet.octopart.com:443/35PX470MEFC10X12.5-Rubycon-datasheet-41169268.pdf?src-supplier=Newark, ComponentLink3URL=https://datasheet.octopart.com:443/35PX470MEFC10X12.5-Rubycon-datasheet-41169268.pdf?src-supplier=Newark, ComponentLink4Description=https://datasheet.octopart.com:443/35PX470MEFC10X12.5-Rubycon-datasheet-12529491.pdf?src-supplier=element14+APAC, ComponentLink4URL=https://datasheet.octopart.com:443/35PX470MEFC10X12.5-Rubycon-datasheet-12529491.pdf?src-supplier=element14+APAC, Diameter=10mm, Height=12.5mm, Height - Seated (Max)=13.9954mm, Lead Pitch=5mm, Length=12.5mm, Life (Hours)=2000hours, Lifecycle Status=Production, Manufacturer Part Number=35PX470MEFC10X12.5, Mounting Technology="Through Hole", Number of Terminals=2, Packaging=Bulk, Pins=2, Polarity=Polar, Pricing="1=0.46, 10=0.25, 50=0.25, 100=0.232, 1000=0.183, 10000=0.183 (USD)", REACH SVHC=Yes, Ripple Current (AC)=525mA, RoHS=Compliant, Schedule B="8532220020, 8532220020|8532220020|8532220020|8532220020|8532220020", Stock=10207, Supplier=Mouser, Terminal Pitch=5mm, Voltage Rating (DC)=35V
CT: library part C0805C332K5RACTU, "SMD Multilayer Ceramic Capacitor, 3300 pF, 50 V, 0805 [2012 Metric], X7R", Case Code (Imperial)=0805, Dielectric=X7R, Dielectric Material=Ceramic, Manufacturer=KEMET, Max Operating Temperature=125°C, Min Operating Temperature=-55°C, Supplier Part Number=80-C0805C332K5R, Temperature Coefficient=30ppm/°C, Tolerance=10%, Voltage=50V, Case/Package=0805, Category="Ceramic Capacitors", China RoHS=Compliant, ComponentLink1Description=https://datasheet.octopart.com:443/C0805C332K5RACTU-KEMET-datasheet-178445679.pdf?src-supplier=IHS, ComponentLink1URL=https://datasheet.octopart.com:443/C0805C332K5RACTU-KEMET-datasheet-178445679.pdf?src-supplier=IHS, ComponentLink2Description=https://datasheet.octopart.com:443/C0805C332K5RAC7800-KEMET-datasheet-182042190.pdf?src-supplier=IHS, ComponentLink2URL=https://datasheet.octopart.com:443/C0805C332K5RAC7800-KEMET-datasheet-182042190.pdf?src-supplier=IHS, ComponentLink3Description=https://datasheet.octopart.com:443/C0805C332K5RACTU-KEMET-datasheet-137357759.pdf?src-supplier=Farnell, ComponentLink3URL=https://datasheet.octopart.com:443/C0805C332K5RACTU-KEMET-datasheet-137357759.pdf?src-supplier=Farnell, ComponentLink4Description=https://datasheet.octopart.com:443/C0805C332K5RACTU-Kemet-datasheet-12608295.pdf?src-supplier=Farnell, ComponentLink4URL=https://datasheet.octopart.com:443/C0805C332K5RACTU-Kemet-datasheet-12608295.pdf?src-supplier=Farnell, ComponentLink5Description=https://datasheet.octopart.com:443/C0805C332K5RACTU-Kemet-datasheet-11992184.pdf?src-supplier=Farnell, ComponentLink5URL=https://datasheet.octopart.com:443/C0805C332K5RACTU-Kemet-datasheet-11992184.pdf?src-supplier=Farnell, ComponentLink6Description=https://datasheet.octopart.com:443/C0805C332K5RACTU-Kemet-datasheet-10942409.pdf?src-supplier=Farnell, ComponentLink6URL=https://datasheet.octopart.com:443/C0805C332K5RACTU-Kemet-datasheet-10942409.pdf?src-supplier=Farnell, ComponentLink7Description=https://datasheet.octopart.com:443/C0805C332K5RACTU-Kemet-datasheet-10404442.pdf?src-supplier=Farnell, ComponentLink7URL=https://datasheet.octopart.com:443/C0805C332K5RACTU-Kemet-datasheet-10404442.pdf?src-supplier=Farnell, ComponentLink8Description=https://datasheet.octopart.com:443/C0805C332K5RACTU-KEMET-datasheet-101576272.pdf?src-supplier=Farnell, ComponentLink8URL=https://datasheet.octopart.com:443/C0805C332K5RACTU-KEMET-datasheet-101576272.pdf?src-supplier=Farnell, ComponentLink9Description=https://datasheet.octopart.com:443/C0805C332K5RACTU-KEMET-datasheet-176142338.pdf?src-supplier=Farnell, ComponentLink9URL=https://datasheet.octopart.com:443/C0805C332K5RACTU-KEMET-datasheet-176142338.pdf?src-supplier=Farnell, ComponentLink10Description=https://datasheet.octopart.com:443/C0805C332K5RACTU-Kemet-datasheet-500041.pdf?src-supplier=Farnell, ComponentLink10URL=https://datasheet.octopart.com:443/C0805C332K5RACTU-Kemet-datasheet-500041.pdf?src-supplier=Farnell, ComponentLink11Description=https://datasheet.octopart.com:443/C0805C332K5RACTU-Kemet-datasheet-10026209.pdf?src-supplier=Farnell, ComponentLink11URL=https://datasheet.octopart.com:443/C0805C332K5RACTU-Kemet-datasheet-10026209.pdf?src-supplier=Farnell, ComponentLink12Description=https://datasheet.octopart.com:443/C0805C332K5RACTU-KEMET-datasheet-68331921.pdf?src-supplier=Upverter, ComponentLink12URL=https://datasheet.octopart.com:443/C0805C332K5RACTU-KEMET-datasheet-68331921.pdf?src-supplier=Upverter, ComponentLink13Description=https://datasheet.octopart.com:443/C0805C332K5RACTU-KEMET-datasheet-159486434.pdf?src-supplier=Newark, ComponentLink13URL=https://datasheet.octopart.com:443/C0805C332K5RACTU-KEMET-datasheet-159486434.pdf?src-supplier=Newark, ComponentLink14Description=https://datasheet.octopart.com:443/C0805C332K5RACTU-Kemet-datasheet-5313890.pdf?src-supplier=Newark, ComponentLink14URL=https://datasheet.octopart.com:443/C0805C332K5RACTU-Kemet-datasheet-5313890.pdf?src-supplier=Newark, ComponentLink15Description=https://datasheet.octopart.com:443/C0805C332K5RACTU-KEMET-datasheet-176142341.pdf?src-supplier=Newark, ComponentLink15URL=https://datasheet.octopart.com:443/C0805C332K5RACTU-KEMET-datasheet-176142341.pdf?src-supplier=Newark, ComponentLink16Description=https://datasheet.octopart.com:443/C0805C332K5RACTU-KEMET-datasheet-130256537.pdf?src-supplier=Newark, ComponentLink16URL=https://datasheet.octopart.com:443/C0805C332K5RACTU-KEMET-datasheet-130256537.pdf?src-supplier=Newark, ComponentLink17Description=https://datasheet.octopart.com:443/C0805C332K5RACTU-Kemet-datasheet-8764837.pdf?src-supplier=Newark, ComponentLink17URL=https://datasheet.octopart.com:443/C0805C332K5RACTU-Kemet-datasheet-8764837.pdf?src-supplier=Newark, ComponentLink18Description=https://datasheet.octopart.com:443/C0805C332K5RACTU-Kemet-datasheet-8480123.pdf?src-supplier=Newark, ComponentLink18URL=https://datasheet.octopart.com:443/C0805C332K5RACTU-Kemet-datasheet-8480123.pdf?src-supplier=Newark, ComponentLink19Description=https://datasheet.octopart.com:443/C0805C332K5RACTU-Kemet-datasheet-5390537.pdf?src-supplier=Newark, ComponentLink19URL=https://datasheet.octopart.com:443/C0805C332K5RACTU-Kemet-datasheet-5390537.pdf?src-supplier=Newark, ComponentLink20Description=https://datasheet.octopart.com:443/C0805C332K5RACTU-Kemet-datasheet-5393970.pdf?src-supplier=Newark, ComponentLink20URL=https://datasheet.octopart.com:443/C0805C332K5RACTU-Kemet-datasheet-5393970.pdf?src-supplier=Newark, ComponentLink21Description=https://datasheet.octopart.com:443/C0805C332K5RACTU-Kemet-datasheet-8502025.pdf?src-supplier=Newark, ComponentLink21URL=https://datasheet.octopart.com:443/C0805C332K5RACTU-Kemet-datasheet-8502025.pdf?src-supplier=Newark, ComponentLink22Description=https://datasheet.octopart.com:443/C0805C332K5RACTU-Kemet-datasheet-7541751.pdf?src-supplier=Newark, ComponentLink22URL=https://datasheet.octopart.com:443/C0805C332K5RACTU-Kemet-datasheet-7541751.pdf?src-supplier=Newark, ComponentLink23Description=https://datasheet.octopart.com:443/C0805C332K5RACTU-Kemet-datasheet-161801.pdf?src-supplier=Newark, ComponentLink23URL=https://datasheet.octopart.com:443/C0805C332K5RACTU-Kemet-datasheet-161801.pdf?src-supplier=Newark, ComponentLink24Description=https://datasheet.octopart.com:443/C0805C332K5RACTU-KEMET-datasheet-37550250.pdf?src-supplier=Electro+Sonic, ComponentLink24URL=https://datasheet.octopart.com:443/C0805C332K5RACTU-KEMET-datasheet-37550250.pdf?src-supplier=Electro+Sonic, ComponentLink25Description=https://datasheet.octopart.com:443/C0805C332K5RACTU-KEMET-datasheet-164512540.pdf?src-supplier=TME, ComponentLink25URL=https://datasheet.octopart.com:443/C0805C332K5RACTU-KEMET-datasheet-164512540.pdf?src-supplier=TME, ComponentLink26Description=https://datasheet.octopart.com:443/C0805C332K5RACTU-Kemet-datasheet-68096424.pdf?src-supplier=TME, ComponentLink26URL=https://datasheet.octopart.com:443/C0805C332K5RACTU-Kemet-datasheet-68096424.pdf?src-supplier=TME, ComponentLink27Description=https://datasheet.octopart.com:443/C0805C332K5RACTU-KEMET-datasheet-68331906.pdf?src-supplier=TME, ComponentLink27URL=https://datasheet.octopart.com:443/C0805C332K5RACTU-KEMET-datasheet-68331906.pdf?src-supplier=TME, ComponentLink28Description=https://datasheet.octopart.com:443/C0805C332K5RACTU-KEMET-datasheet-110724412.pdf?src-supplier=RS+(Formerly+Allied+Electronics), ComponentLink28URL=https://datasheet.octopart.com:443/C0805C332K5RACTU-KEMET-datasheet-110724412.pdf?src-supplier=RS+(Formerly+Allied+Electronics), ComponentLink29Description=https://datasheet.octopart.com:443/C0805C332K5RACTU-Kemet-datasheet-464.pdf?src-supplier=RS+(Formerly+Allied+Electronics), ComponentLink29URL=https://datasheet.octopart.com:443/C0805C332K5RACTU-Kemet-datasheet-464.pdf?src-supplier=RS+(Formerly+Allied+Electronics), ComponentLink30Description=https://datasheet.octopart.com/C0805C332K5RACTU-KEMET-datasheet-84169754.pdf, ComponentLink30URL=https://datasheet.octopart.com/C0805C332K5RACTU-KEMET-datasheet-84169754.pdf, ComponentLink31Description=https://datasheet.octopart.com:443/C0805C332K5RACTU-Kemet-datasheet-22084244.pdf?src-supplier=element14+APAC, ComponentLink31URL=https://datasheet.octopart.com:443/C0805C332K5RACTU-Kemet-datasheet-22084244.pdf?src-supplier=element14+APAC, ComponentLink32Description=https://datasheet.octopart.com:443/C0805C332K5RAC7800-KEMET-datasheet-164857143.pdf?src-supplier=Burklin+Elektronik, ComponentLink32URL=https://datasheet.octopart.com:443/C0805C332K5RAC7800-KEMET-datasheet-164857143.pdf?src-supplier=Burklin+Elektronik, ComponentLink33Description=https://datasheet.octopart.com:443/C0805C332K5RAC-TU-Kemet-datasheet-8196850.pdf?src-supplier=Jameco, ComponentLink33URL=https://datasheet.octopart.com:443/C0805C332K5RAC-TU-Kemet-datasheet-8196850.pdf?src-supplier=Jameco, Contact Plating=Tin, Country of Origin=Mexico, Depth=1.25mm, Dissipation Factor=2.5%, Export Control Classification Number (ECCN) Code=EAR99, Harmonized Tariff Schedule (HTS) Code=8532.24.00.20, Height=780µm, Introduction Date=2008-01-10, Lead Free="Lead Free", Lead Pitch=750µm, Length=2mm, Lifecycle Status=Production, Manufacturer Part Number=C0805C332K5RACTU, Material=Ceramic, Mounting Technology="Surface Mount", Number of Terminals=2, Packaging="Cut Tape", Pins=2, Pricing="1=0.1, 10=0.03, 50=0.03, 100=0.026, 500=0.019, 1000=0.017, 4000=0.009, 8000=0.008, 10000=0.008 (USD)", Radiation Hardening=No, REACH SVHC=Yes, RoHS=Compliant, Schedule B="8532240020, 8532240020|8532240020, 8532240020|8532240020|8532240020, 8532240020|8532240020|8532240020|8532240020", Stock=23962, Supplier=Mouser, Termination=SMD/SMT, Thickness=889µm, Voltage Rating=50V, Voltage Rating (AC)=50V, Voltage Rating (DC)=50V, Width=1.25mm
D1: library part CDBA3100-G, "Rectifier Diode, Schottky, 1 Phase, 1 Element, 3A, 100V V(RRM), Silicon, DO-214AC", Average Rectified Current=3A, Forward Voltage=850mV, Manufacturer=Comchip, Max Forward Surge Current (Ifsm)=80A, Max Operating Temperature=150°C, Max Reverse Leakage Current=500µA, Max Reverse Voltage (DC)=100V, Min Operating Temperature=-55°C, Supplier Part Number=641-1099-1-ND, Category="Rectifier Diodes", ComponentLink1Description=https://datasheet.octopart.com:443/CDBA3100-G-Comchip-datasheet-180126795.pdf?src-supplier=IHS, ComponentLink1URL=https://datasheet.octopart.com:443/CDBA3100-G-Comchip-datasheet-180126795.pdf?src-supplier=IHS, ComponentLink2Description=https://datasheet.octopart.com:443/CDBA3100-G-Comchip-datasheet-14434128.pdf?src-supplier=RS+(Formerly+Allied+Electronics), ComponentLink2URL=https://datasheet.octopart.com:443/CDBA3100-G-Comchip-datasheet-14434128.pdf?src-supplier=RS+(Formerly+Allied+Electronics), Contact Plating=Tin, Lifecycle Status=Obsolete, Manufacturer Part Number=CDBA3100-G, Max Output current=3A, Max Surge Current=80A, Mounting Technology="Surface Mount", Number of Elements=1, Number of Terminals=2, Peak Reverse Current=500µA, Pricing="1=0.32, 10=0.284, 100=0.2475, 500=0.24302, 2000=0.22072 (USD)", REACH SVHC=No, Reverse Standoff Voltage=100V, RoHS=Compliant, Schedule B="8541100070, 8541100070|8541100070, 8541100070|8541100070|8541100070, 8541100070|8541100070|8541100070|8541100070", Stock=37850, Supplier=DigiKey
"Fan Conn": library part 1935776, "Conn Terminal Block 2 POS 5mm Solder ST Thru-Hole 32ACardboard", Color=Green, Current=20A, Current Rating=32A, Manufacturer="Phoenix Contact", Max Supply Voltage=250V, Supplier Part Number=651-1935776, Voltage=300V, Approvals=UL, Category="Terminal Blocks", China RoHS=Non-Compliant, ComponentLink1Description=https://datasheet.octopart.com:443/1935776-Phoenix-Contact-datasheet-154783799.pdf?src-supplier=Electro+Sonic, ComponentLink1URL=https://datasheet.octopart.com:443/1935776-Phoenix-Contact-datasheet-154783799.pdf?src-supplier=Electro+Sonic, ComponentLink2Description=https://datasheet.octopart.com:443/1935776-Phoenix-Contact-datasheet-33522892.pdf?src-supplier=MRO+Stop, ComponentLink2URL=https://datasheet.octopart.com:443/1935776-Phoenix-Contact-datasheet-33522892.pdf?src-supplier=MRO+Stop, ComponentLink3Description=https://datasheet.octopart.com:443/1935776-Phoenix-Contact-datasheet-140322698.pdf?src-supplier=Farnell, ComponentLink3URL=https://datasheet.octopart.com:443/1935776-Phoenix-Contact-datasheet-140322698.pdf?src-supplier=Farnell, ComponentLink4Description=https://datasheet.octopart.com:443/1935776-Phoenix-Contact-datasheet-9718601.pdf?src-supplier=RS+(Formerly+Allied+Electronics), ComponentLink4URL=https://datasheet.octopart.com:443/1935776-Phoenix-Contact-datasheet-9718601.pdf?src-supplier=RS+(Formerly+Allied+Electronics), ComponentLink5Description=https://datasheet.octopart.com:443/1935776-Phoenix-Contact-datasheet-62084812.pdf?src-supplier=RS+(Formerly+Allied+Electronics), ComponentLink5URL=https://datasheet.octopart.com:443/1935776-Phoenix-Contact-datasheet-62084812.pdf?src-supplier=RS+(Formerly+Allied+Electronics), ComponentLink6Description=https://datasheet.octopart.com:443/1935776-Phoenix-Contact-datasheet-164875068.pdf?src-supplier=Burklin+Elektronik, ComponentLink6URL=https://datasheet.octopart.com:443/1935776-Phoenix-Contact-datasheet-164875068.pdf?src-supplier=Burklin+Elektronik, Contact Material=Tin, Depth=9mm, Height=13.5mm, Housing Color=Green, Housing Material=Polyamide, Lead Free="Lead Free", Length=9mm, Lifecycle Status=Production, Manufacturer Part Number=1935776, Material=Nylon, Max Current Rating=32A, Mounting Technology=Screw, Number of Circuits=2, Number of Contacts=2, Number of Levels=1, Number of Poles=2, Number of Positions=2, Number of Positions Per Level=2, Number of Rows=1, Orientation=Straight, Packaging=Bulk, Pins=2, Pitch=5mm, Pricing="1=0.81, 10=0.593, 50=0.479, 100=0.47, 1000=0.47, 10000=0.47 (USD)", Radiation Hardening=No, REACH SVHC=No, RoHS=Compliant, Stock=3159, Supplier=Mouser, Termination=Solder, Voltage Rating=250V, Weight=2.42g, Width=17.6mm, Wire Gauge (Max)=20AWG, Wire Gauge (Min)=12AWG, Wire/Cable Gauge=10AWG
L1: library part BMRA000606306R8MA1, "Inductor Power Molded/Shielded Wirewound 6.8uH 20% 100kHz 4.5A SMD T/R", DC Resistance (DCR)=60mΩ, Manufacturer="Pulse Electronics", Max Current Rating=4.5A, Max Operating Temperature=125°C, Min Operating Temperature=-55°C, Supplier Part Number=603-BMRA0606306R8MA1, Test Frequency=100kHz, Tolerance=20%, Category="Fixed Inductors", ComponentLink1Description=https://datasheet.octopart.com:443/BMRA000606306R8MA1-Pulse-datasheet-180094538.pdf?src-supplier=IHS, ComponentLink1URL=https://datasheet.octopart.com:443/BMRA000606306R8MA1-Pulse-datasheet-180094538.pdf?src-supplier=IHS, ComponentLink2Description=https://datasheet.octopart.com:443/BMRA000606306R8MA1-Pulse-datasheet-155427411.pdf?src-supplier=IHS, ComponentLink2URL=https://datasheet.octopart.com:443/BMRA000606306R8MA1-Pulse-datasheet-155427411.pdf?src-supplier=IHS, Core Material=Composite, Country of Origin="Mainland China, Taiwan", Export Control Classification Number (ECCN) Code=EAR99, Harmonized Tariff Schedule (HTS) Code=8504.50.80.00, Height=3mm, Introduction Date=2021-03-29, Lifecycle Status=Production, Manufacturer Part Number=BMRA000606306R8MA1, Number of Circuits=1, Number of Terminals=2, Pricing="1=0.39, 10=0.318, 50=0.318, 100=0.262, 1000=0.211, 10000=0.187 (USD)", REACH SVHC=Yes, RoHS=Compliant, Shielding=Shielded, Stock=20018, Supplier=Mouser, Width=6.6mm